# Altium PCB NEW_UI.PcbDoc (part 2 of 4)
Units mm, origin at the board's own origin, x right, y up, seen from the top; angles counter-clockwise.
Board outline 100 x 100 mm, 4 copper layers (SIG/PWR1, GND1, GNS2, SIG/PWR2), stack 1.17 mm thick; 240 components, 215 nets, 917 pads, 445 vias.
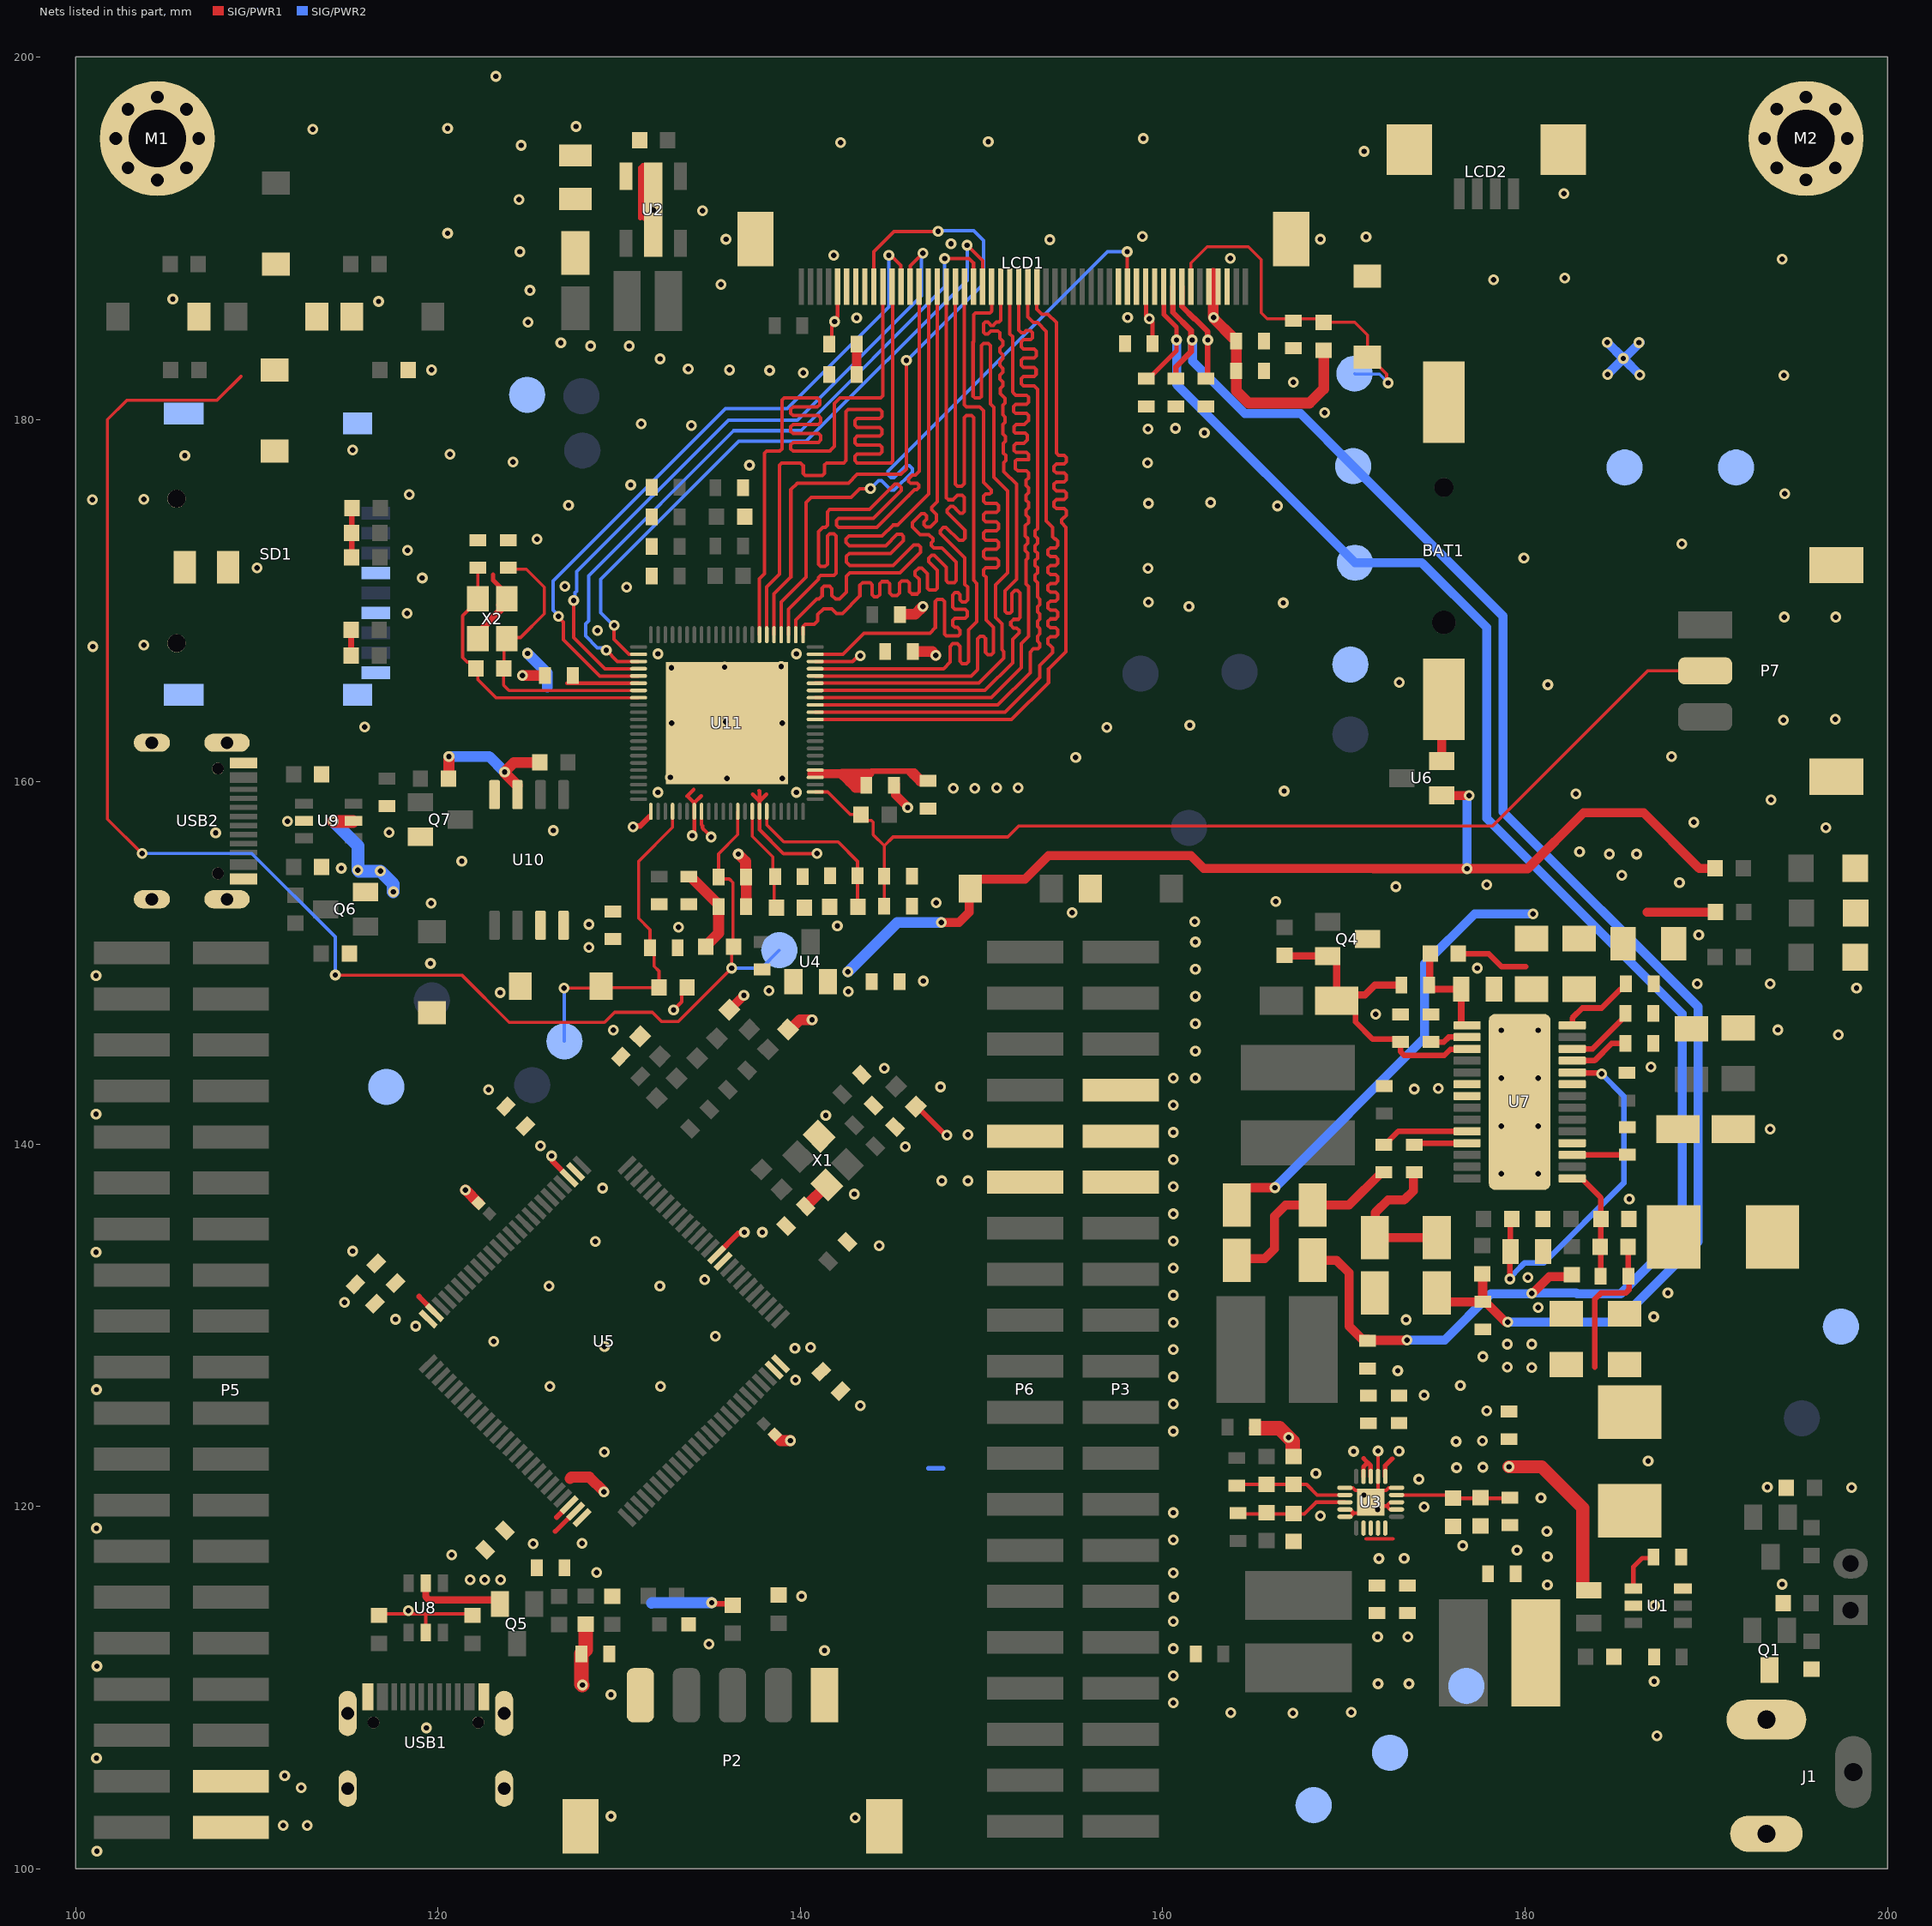
[diagram p4: the nets of this part, all layers, seen from the top]

## Via types
v1: diameter 0.6, hole 0.3, SIG/PWR1 to SIG/PWR2, tented both sides, 431 vias
v2: diameter 0.6, hole 0.3, SIG/PWR1 to SIG/PWR2, tented bottom, 12 vias
v3: diameter 0.6, hole 0.3, SIG/PWR1 to SIG/PWR2, 2 vias

## Nets (pads, with @x,y where several pads share a name; then routed paths per layer and width w, separated by ;. In a path a pad name is that pad's centre, name@x,y a point inside that pad or via, vN(x,y) a via of type N, cw(c..) or ccw(c..) an arc to the next point about the centre after c; other vN are vias at no path point) (continued)
3V3: C5.2 C7.2 C14.2 C15.2 C16.2 C17.2 C18.2 C19.2 C61.2 C72.2 C73.2 C74.2 C75.2 C76.2 C82.2 C85.2 C86.2 L3.1 P2.5 P3.16 P3.17 P6.16 R8.2 R14.1 R16.1 R20.2 R22.1 R39.1 R45.2 R46.2 R47.2 R48.2 R49.2 R54.2 R59.2 R65.2 R70.2 SD1.4 SW2.2 TP14.1 U4.2 U5.11 U5.28 U5.50 U5.75 U5.100 U6.1 U10.3 U10.7 U10.8 U11.4 U11.5 U11.20 U11.50 U11.67 U11.74 | length 110.9
  SIG/PWR1 w0.2: C82.2@127.121,165.436 U11.50@131.068,165.436 ; v1(132.996,147.401) 133,147.401 133.452,147.853 133.452,148.348 R59.2@133.744,148.641 ; U11.74@134.543,158.361 134.543,157.621 134.597,157.567 134.597,157.462 134.608,157.416 134.655,157.369 v1(135.077,156.947) ; U11.20@140.818,166.636 142.881,166.636 143.199,166.954 v1(143.307,166.954)
  SIG/PWR1 w0.3: 143.816,160.467 143.929,160.58 146.304,160.58
  SIG/PWR1 w0.308: R46.2@115.201,166.954 R45.2@115.201,168.377 ; R49.2@115.227,172.39 115.24,172.403 115.24,175.095 R47.2@115.252,175.108 ; v1(126.263,139.344) 126.319,139.289 126.319,139.044 U5.28@127.239,138.124 ; v1(130.759,157.505) 130.815,157.561 131.165,157.561 U11.67@131.689,158.085 ; v1(135.103,114.681) 135.158,114.625 136.187,114.625 R14.1@136.271,114.542 ; U5.11@135.371,133.881 136.563,135.072 136.85,135.072 v1(136.906,135.128) ; R20.2@146.369,142.073 146.433,142.073 148.018,140.487 v1(148.082,140.487)
  SIG/PWR1 w0.4: 146.025,160.528 146.355,160.198
  SIG/PWR1 w0.5: 140.64,160.436 141.767,160.436 ; 141.783,160.452 142.291,160.452 ; 142.306,160.467 142.814,160.467 ; 142.84,160.467 143.348,160.467 ; 143.373,160.467 143.816,160.467 ; v1(147.777,152.222) 148.752,152.222 149.321,152.791 149.321,154.046 SW2.2@149.377,154.102 149.377,154.229 149.762,154.614 152.394,154.614 153.698,155.918 161.549,155.918 162.256,155.211 171.631,155.211 171.642,155.199 v1(176.801,155.199) 180.142,155.199 183.236,158.293 186.538,158.293 189.611,155.219 R39.1@190.487,155.219 ; U6.1@175.403,159.248 175.41,159.24 176.903,159.24 v1(176.911,159.233)
  SIG/PWR1 w0.6: R70.2@120.574,160.172 120.599,160.197 v1(120.599,161.392) ; U10.3@124.374,159.788 123.672,160.49 v1(123.672,160.541) 124.192,161.061 R54.2@125.615,161.061 ; C73.2@133.968,154.732 133.994,154.732 133.994,154.707 C72.2@135.371,153.329 ; R65.2@134.772,150.901 134.772,150.926 135.484,151.638 C72.2@135.484,153.111 ; R22.1@139.308,146.319 139.434,146.319 139.978,146.863 v1(140.64,146.863) ; 142.392,160.35 142.723,160.02 ; 143.277,160.02 142.723,160.02 ; C75.2@143.637,159.791 143.637,159.72 143.607,159.69 143.053,159.69 142.723,160.02 ; 146.253,160.426 146.634,160.045 C74.2@147.041,160.045
  SIG/PWR2 w0.5: v1(176.801,155.199) 176.801,159.095 176.911,159.206 v1(176.911,159.233)
  SIG/PWR2 w0.6: v1(120.599,161.392) 122.813,161.392 123.663,160.541 v1(123.672,160.541) ; v1(124.943,167.081) 126.022,166.002 126.022,165.227 ; 131.775,114.656 131.801,114.681 v1(135.103,114.681) ; v1(142.621,149.504) 145.339,152.222 v1(147.777,152.222)
  other v1: 129.54,109.601 181.229,115.672 128.753,116.357 181.229,117.221 179.553,117.577 127.94,117.958 181.204,118.618 139.7,128.727 140.564,128.778 118.77,129.946 117.653,130.327 137.897,135.128 125.654,139.903 149.25,140.513 142.646,148.412 128.321,150.851 128.321,152.121 148.438,159.639 149.631,159.639 150.825,159.664 152.019,159.664
"3V3 LCD": C45.2 C48.2 C49.2 C54.2 C55.2 C56.2 C57.2 C58.2 L7.2 LCD1.6 LCD1.7 LCD1.8 LCD1.39 LCD1.46 LCD1.47 R37.2 R40.2 TP10.1 | length 27.9
  SIG/PWR1 w0.254: LCD1.39@159.053,187.325 159.076,187.302 159.076,185.729 v1(159.256,185.549) 159.436,185.369 C55.2@159.436,184.175
  SIG/PWR1 w0.308: 183.85,127.68 183.85,131.439 184.186,131.775 185.547,131.775 185.729,131.957 185.729,132.666 C45.2@185.695,132.699 ; R37.2@185.683,134.323 185.693,134.313 C45.2@185.695,132.699
  SIG/PWR1 w0.5: C57.2@143.104,182.474 C58.2@143.104,184.15
  SIG/PWR1 w0.6: 162.789,188.062 162.789,185.649 v1(162.814,185.623) 162.814,185.572 163.898,184.489 164.029,184.489 164.059,184.459 C56.2@164.059,184.328 C54.2@164.059,182.677 164.059,181.585 164.744,180.899 168.097,180.899 168.885,181.686 R40.2@168.885,183.807
  other v1: 180.365,127.66 179.019,127.686 179.019,128.956 180.365,128.956 143.104,185.598
5V: C2.2 C6.2 C10.2 C11.2 C13.2 L1.2 P5.19 Q5.2 Q6.2 R1.2 TP6.1 U3.7 U3.8 U3.9 U3.10 U3.16 U3.18 U3.19 U8.5 U9.5 | length 26.3
  SIG/PWR1 w0.2: 171.228,118.212 172.695,118.212
  SIG/PWR1 w0.254: U3.19@171.081,121.653 171.08,121.654 171.08,122.186 171.208,122.314 ; 171.083,122.645 171.474,122.254 171.474,121.66 U3.18@171.481,121.653 ; U3.16@172.281,121.653 172.281,122.245 172.672,122.636
  SIG/PWR1 w0.4: U8.5@119.319,115.76 119.319,115.021 119.509,114.832 123.189,114.832 Q5.2@123.408,114.613
  SIG/PWR1 w0.712: v1(114.224,157.81) U9.5@115.303,157.81 ; v1(179.114,122.186) 180.912,122.186 183.185,119.913 183.185,115.468 183.286,115.367 R1.2@183.515,115.367
  SIG/PWR2 w0.712: v1(114.224,157.81) 115.57,156.464 v1(115.57,155.118) 115.621,155.067 v1(116.815,155.067) 117.526,154.356 v1(117.526,153.924)
  other v1: 112.446,104.47 111.531,105.131 121.768,115.951 122.58,115.951 123.444,115.951 171.933,117.119 173.325,117.129 176.218,122.136 177.666,122.161 170.536,123.038 173.043,123.05 176.193,123.583 177.641,123.609
9V: J1.1 P5.20 Q1.3 R2.2
  other v1: 111.455,102.387 112.776,102.387
10.4V: C3.2 C32.2 C33.2 C34.2 C51.2 D1.1 D4.2 LCD1.43 Q4.3 R5.2 R28.1 R30.2 TP8.1 U2.5 | length 44.3
  SIG/PWR1 w0.308: LCD1.43@161.053,187.325 161.057,187.321 161.057,186.238 161.754,185.542 161.787,185.542 162.484,184.845 v1(162.484,184.379) 162.484,182.347 C51.2@162.382,182.245 ; R30.2@176.311,150.505 177.993,150.505 178.714,149.784 180.043,149.784
  SIG/PWR1 w0.5: D4.2@164.084,136.628 164.084,137.053 164.609,137.578 164.888,137.578 164.902,137.592 v1(166.192,137.592) ; 186.741,152.806 R28.1@190.512,152.806
  SIG/PWR2 w0.5: v1(166.192,137.592) 174.455,145.855 174.455,149.944 177.216,152.705 v1(180.442,152.705) ; v1(184.531,184.252) v1(185.42,183.363) ; v1(184.556,182.474) 184.556,182.486 185.42,183.35 v1(185.42,183.363) ; v1(186.334,182.448) v1(185.42,183.363) ; v1@186.36,184.252 185.617,183.509 185.594,183.509 185.447,183.363 v1(185.42,183.363)
  other v1: 185.344,154.838 184.658,156.007 186.157,156.007 186.284,184.239
16V: C40.2 C52.2 D6.1 LCD1.41 R33.2 TP9.1 | length 98.2
  SIG/PWR1 w0.254: C52.2@159.08,182.245 159.211,182.245 160.757,183.79 v1(160.757,184.379) 160.757,185.09 160.053,185.793 LCD1.41@160.053,187.325
  SIG/PWR1 w0.5: D6.1@168.271,133.587 169.587,133.587 170.282,132.893 170.282,129.946 171.014,129.214 171.351,129.214 171.4,129.165 173.463,129.165 v1(173.482,129.184) ; v1(180.375,131.76) 180.402,131.76 180.464,131.822 180.488,131.822 181.344,132.677 182.46,132.677 R33.2@182.571,132.788
  SIG/PWR2 w0.5: v1(160.757,184.379) 160.776,184.359 160.776,181.921 TP9.1@170.612,172.085 174.295,172.085 177.876,168.504 177.876,157.988 188.671,147.193 188.671,135.128 185.268,131.724 182.876,131.724 182.817,131.783 180.425,131.783 180.421,131.779 v1@180.392,131.779 ; v1(173.482,129.184) 175.565,129.184 178.123,131.743 180.358,131.743 v1(180.375,131.76)
-7V: C41.1 C53.2 D5.2 LCD1.42 R34.2 TP11.1 | length 87.5
  SIG/PWR1 w0.308: LCD1.42@160.553,187.325 160.557,187.321 160.557,185.908 161.564,184.902 161.564,184.434 v1(161.62,184.379) ; C53.2@160.731,182.245 160.731,182.905 161.564,183.739 161.564,184.358 v1@161.544,184.379
  SIG/PWR1 w0.5: D5.2@175.129,131.784 175.62,131.293 C41.1@177.658,131.293 ; R34.2@177.643,132.839 177.658,132.824 177.658,131.307 177.789,131.307 178.902,130.194 179.025,130.194 v1(179.045,130.175)
  SIG/PWR2 w0.5: v1(161.62,184.379) 161.639,184.359 161.639,183.216 164.541,180.315 167.615,180.315 TP11.1@170.51,177.419 178.791,169.139 178.791,158.344 189.56,147.574 189.56,134.62 185.115,130.175 v1(179.045,130.175)
B0: LCD1.12 U11.49 | length 38.2
  SIG/PWR1 w0.191: v1(126.642,169.131) 126.642,169.083 126.924,168.801 126.924,167.843 128.931,165.836 U11.49@131.068,165.836 ; v1(144.882,189.052) 144.99,189.052 145.548,188.494 145.548,187.33 LCD1.12@145.553,187.325
  SIG/PWR2 w0.191: v1(126.642,169.131) 126.642,169.158 126.34,169.461 126.34,171.069 135.865,180.594 139.268,180.594 144.882,186.207 v1(144.882,189.052)
B1: LCD1.13 U11.48 | length 37.9
  SIG/PWR1 w0.191: v1(127.483,170.002) 127.483,167.955 129.201,166.236 U11.48@131.068,166.236 ; LCD1.13@146.053,187.325 146.067,187.339 146.067,188.485 v1(146.761,189.179)
  SIG/PWR2 w0.191: v1(127.483,170.002) 127.559,170.079 127.559,170.43 127.648,170.519 127.648,171.59 136.017,179.959 139.827,179.959 146.679,186.811 146.679,189.097 v1(146.761,189.179)
B2: LCD1.14 U11.25 | length 40.2
  SIG/PWR1 w0.191: U11.25@139.343,168.111 139.343,169.518 140.995,171.171 140.995,171.266 141.118,171.389 141.854,171.389 141.977,171.511 141.977,173.555 141.854,173.677 141.609,173.677 141.486,173.555 141.486,172.002 141.364,171.88 141.118,171.88 140.995,172.002 140.995,173.812 141.224,174.041 141.275,174.041 141.37,174.041 141.493,174.164 141.493,174.9 141.616,175.022 143.815,175.022 145.211,176.419 145.385,176.419 145.558,176.246 145.558,176.072 144.018,174.532 142.106,174.532 141.984,174.409 141.984,174.164 142.106,174.041 144.221,174.041 145.956,175.775 146.11,175.929 146.294,176.114 146.425,176.114 146.543,176.231 146.543,176.379 146.442,176.479 146.076,176.479 145.975,176.58 145.975,176.721 146.19,176.936 146.355,176.936 146.553,177.135 LCD1.14@146.553,187.325 LCD1.14@146.553,187.835
B3: LCD1.15 U11.24 | length 41.2
  SIG/PWR1 w0.191: U11.24@139.743,168.111 139.743,168.927 140.894,170.078 141.021,170.078 141.199,170.256 141.199,170.688 141.3,170.79 141.605,170.79 141.732,170.663 141.732,170.282 141.935,170.078 142.164,170.078 142.545,170.459 142.545,171.348 142.723,171.526 145.491,171.526 146.634,172.669 146.634,172.949 146.507,173.076 146.253,173.076 145.11,171.933 142.723,171.933 142.545,172.11 142.545,172.441 142.697,172.593 144.983,172.593 145.694,173.304 145.694,173.548 145.583,173.66 145.339,173.66 144.704,173.025 142.697,173.025 142.519,173.203 142.519,173.406 142.672,173.558 144.501,173.558 145.11,174.168 145.364,174.168 147.073,175.876 LCD1.15@147.073,187.854
B4: LCD1.16 U11.23 | length 40.3
  SIG/PWR1 w0.191: U11.23@140.143,168.111 140.148,168.117 140.148,168.571 140.259,168.681 140.767,168.681 140.957,168.872 140.957,169.228 141.275,169.545 141.733,169.545 141.987,169.291 142.316,169.291 143.281,170.256 143.281,170.84 143.434,170.993 143.85,170.993 143.967,170.876 143.967,170.326 144.084,170.209 144.25,170.209 144.374,170.332 144.374,170.926 144.491,171.044 144.815,171.044 144.932,170.926 144.932,170.409 145.059,170.282 145.339,170.282 145.466,170.409 145.466,170.952 145.583,171.069 145.907,171.069 146.025,170.952 146.025,170.485 146.152,170.358 146.431,170.358 146.558,170.485 146.558,171.171 146.329,171.399 146.329,171.602 146.526,171.799 146.692,171.799 147.015,171.475 147.015,170.677 147.116,170.577 147.455,170.577 147.555,170.677 147.555,171.672 147.091,172.136 147.091,172.339 147.244,172.491 147.396,172.491 148.057,171.831 148.057,171.093 148.157,170.993 148.49,170.993 148.59,171.093 148.59,172.11 147.803,172.898 147.374,172.898 147.227,173.044 147.227,173.186 147.313,173.271 147.313,173.413 147.091,173.634 146.609,173.634 146.177,174.066 146.177,174.295 146.678,174.796 146.844,174.796 146.964,174.676 146.964,174.498 146.815,174.349 146.815,174.183 146.933,174.066 147.168,174.066 147.498,174.396 147.498,174.752 147.239,175.011 147.239,175.153 147.553,175.468 LCD1.16@147.553,187.325
B5: LCD1.17 U11.21 | length 40.1
  SIG/PWR1 w0.191: U11.21@140.818,167.036 142.348,167.036 143.51,168.199 147.142,168.199 147.447,168.504 147.447,169.936 147.564,170.053 147.828,170.053 147.945,169.936 147.945,168.147 148.046,168.046 148.718,168.046 148.819,168.147 148.819,168.351 148.656,168.513 148.514,168.513 148.397,168.631 148.397,168.894 148.514,169.012 149.098,169.012 149.215,169.129 149.215,169.393 149.098,169.51 148.514,169.51 148.397,169.627 148.397,170.291 148.536,170.431 148.701,170.431 148.819,170.313 148.819,170.043 148.936,169.926 149.108,169.926 149.225,170.043 149.225,170.746 149.073,170.898 149.073,172.348 147.71,173.711 147.71,173.853 147.893,174.036 148.035,174.036 148.75,173.321 148.963,173.321 149.08,173.438 149.08,173.874 148.09,174.865 148.09,175.007 148.29,175.208 148.432,175.208 148.565,175.076 148.565,175.057 148.805,174.816 148.805,174.814 148.947,174.814 149.047,174.914 149.047,175.686 148.93,175.803 148.666,175.803 148.428,175.565 148.171,175.565 148.053,175.682 LCD1.17@148.053,187.325
B6: LCD1.18 U11.19 | length 40
  SIG/PWR1 w0.191: U11.19@140.818,166.236 147.898,166.236 148.26,166.599 148.26,167.462 148.412,167.615 148.666,167.615 148.81,167.47 148.81,166.644 148.937,166.517 149.162,166.517 149.28,166.634 149.28,168.38 149.733,168.834 149.733,170.942 149.555,171.12 149.555,180.096 149.438,180.213 149.164,180.213 149.047,180.096 149.047,176.454 148.895,176.301 148.671,176.301 148.553,176.419 LCD1.18@148.553,187.325
B7: LCD1.19 U11.18 | length 39.8
  SIG/PWR1 w0.191: U11.18@140.818,165.836 149.428,165.836 149.784,166.192 149.784,167.894 149.912,168.022 150.098,168.022 150.216,167.905 150.216,167.143 150.344,167.015 150.53,167.015 150.647,167.132 150.647,168.529 150.241,168.935 150.241,171.298 150.12,171.419 150.12,171.693 150.237,171.81 150.821,171.81 150.938,171.927 150.938,172.201 150.821,172.318 150.237,172.318 150.12,172.435 150.12,172.709 150.237,172.826 150.821,172.826 150.938,172.943 150.938,173.217 150.821,173.334 150.237,173.334 150.12,173.451 150.12,173.725 150.237,173.842 150.821,173.842 150.938,173.959 150.938,174.233 150.821,174.35 150.237,174.35 150.12,174.467 150.12,174.741 150.237,174.858 150.821,174.858 150.938,174.975 150.938,175.249 150.821,175.366 150.237,175.366 150.12,175.483 150.12,175.757 150.237,175.874 150.444,175.874 150.536,175.966 150.536,176.108 150.114,176.53 150.114,180.467 149.885,180.696 149.154,180.696 149.053,180.796 LCD1.19@149.053,187.325
F1C_OSC_IN: C71.2 R58.2 U11.51 X2.1 | length 16.6
  SIG/PWR1 w0.171: X2.1@123.793,167.897 123.635,167.739 R58.2@123.635,166.243 123.619,166.227 123.619,165.332 123.914,165.036 U11.51@131.068,165.036 ; X2.1@123.876,167.897 123.937,167.958 124.55,167.958 125.857,169.266 125.857,170.739 124.866,171.73 C71.2@123.876,171.73
F1C_OSC_OUT: C77.2 R58.1 U11.52 X2.3 | length 16.2
  SIG/PWR1 w0.171: C77.2@122.199,171.73 122.199,170.103 X2.3@122.193,170.097 122.193,169.997 121.355,169.159 121.355,166.856 121.604,166.607 121.745,166.607 122.085,166.268 R58.1@122.085,166.243 122.196,166.131 122.196,165.636 123.196,164.636 U11.52@131.068,164.636
F1C_RST: C78.2 R59.1 SW5.2 TP24.1 U11.70 | length 19.2
  SIG/PWR1 w0.171: v1(126.949,148.615) 128.905,148.615 SW5.2@129.007,148.717 129.083,148.641 R59.1@132.194,148.641 132.194,149.543 131.927,149.81 131.927,150.704 C78.2@131.795,150.836 ; C78.2@131.699,150.825 131.699,151.824 131.064,152.459 131.064,155.6 132.943,157.479 U11.70@132.943,158.361
  SIG/PWR2 w0.171: v1(126.949,148.615) 126.962,148.603 126.962,145.682 TP24.1@126.975,145.669
G0: LCD1.20 U11.47 | length 37.7
  SIG/PWR1 w0.191: v1(129.286,167.259) 129.909,166.636 U11.47@131.068,166.636 ; v1(147.96,188.879) 149.305,188.879 149.553,188.63 LCD1.20@149.553,187.325
  SIG/PWR2 w0.191: v1(129.286,167.259) 129.178,167.259 129.04,167.397 128.797,167.397 128.143,168.05 128.143,168.707 128.321,168.884 128.321,171.374 136.322,179.375 140.03,179.375 147.96,187.305 v1(147.96,188.879)
G1: LCD1.21 U11.46 | length 37
  SIG/PWR1 w0.191: v1(129.718,168.631) 129.701,168.613 129.701,167.869 130.532,167.038 131.066,167.038 U11.46@131.068,167.036 ; v1(149.2,189.611) 150.053,188.757 LCD1.21@150.053,187.325
  SIG/PWR2 w0.191: v1(129.718,168.631) 129.671,168.631 128.981,169.32 128.981,171.171 136.601,178.791 140.31,178.791 149.2,187.681 v1(149.2,189.611)
G2: LCD1.22 U11.17 | length 40
  SIG/PWR1 w0.191: U11.17@140.818,165.436 149.841,165.436 151.232,166.827 151.232,167.183 151.13,167.284 151.13,168.721 150.774,169.077 150.774,170.866 151.435,171.526 151.435,176.047 150.673,176.809 150.673,180.67 150.495,180.848 150.495,184.082 150.378,184.199 150.104,184.199 149.987,184.082 149.987,181.264 149.901,181.178 149.63,181.178 149.53,181.279 149.53,184.252 149.555,184.277 149.555,185.777 149.656,185.877 150.453,185.877 150.553,185.978 LCD1.22@150.553,187.325
G3: LCD1.23 U11.16 | length 39.7
  SIG/PWR1 w0.191: U11.16@140.818,165.036 150.19,165.036 151.714,166.56 151.714,167.863 152.065,168.214 152.065,168.356 151.937,168.484 151.765,168.484 151.613,168.636 151.613,168.808 151.765,168.961 152.02,168.961 152.121,169.061 152.121,170.409 151.976,170.554 151.834,170.554 151.673,170.393 151.673,169.402 151.566,169.295 151.4,169.295 151.282,169.412 151.282,170.529 151.927,171.174 151.927,176.419 151.224,177.121 151.224,177.615 151.342,177.733 151.342,178.006 151.205,178.143 151.205,178.671 151.322,178.788 151.322,179.062 151.185,179.199 151.185,179.726 151.302,179.843 151.302,180.117 151.165,180.254 151.165,180.782 151.282,180.899 151.282,181.173 151.028,181.427 151.028,181.7 151.181,181.853 151.181,182.056 151.009,182.228 151.009,182.431 151.181,182.603 151.181,182.806 151.009,182.979 151.009,183.182 151.181,183.354 151.181,183.557 151.009,183.729 151.009,183.932 151.181,184.104 151.181,184.308 151.003,184.485 151.003,184.785 150.901,184.887 150.649,184.887 150.647,184.885 150.519,184.885 150.443,184.809 150.343,184.709 150.214,184.709 150.114,184.809 150.114,185.269 150.214,185.369 150.343,185.369 150.418,185.293 150.519,185.193 150.647,185.193 150.723,185.269 150.823,185.369 150.952,185.369 151.053,185.471 LCD1.23@151.053,187.325
G4: LCD1.24 U11.15 | length 39.6
  SIG/PWR1 w0.191: U11.15@140.818,164.636 150.539,164.636 152.197,166.294 152.197,167.615 152.603,168.021 152.603,170.764 152.451,170.917 152.451,172.237 152.552,172.339 152.552,172.613 152.416,172.75 152.416,173.023 152.552,173.16 152.552,173.434 152.416,173.571 152.416,174.133 152.588,174.305 152.588,174.579 152.451,174.716 152.451,174.989 152.588,175.126 152.588,175.4 152.451,175.537 152.451,175.81 152.588,175.947 152.588,176.221 152.451,176.358 152.451,176.632 152.586,176.766 152.586,177.04 152.468,177.157 151.997,177.157 151.867,177.288 151.867,177.698 151.951,177.782 152.586,177.782 152.586,178.056 152.468,178.173 151.9,178.173 151.79,178.283 151.79,178.556 151.908,178.673 152.344,178.673 152.527,178.857 152.527,179.131 152.41,179.248 151.867,179.248 151.79,179.324 151.79,179.598 151.908,179.715 152.369,179.715 152.527,179.873 ; LCD1.24@151.553,187.325 151.553,184.717 151.709,184.562 151.709,181.514 ; 151.767,181.456 151.884,181.338 152.468,181.338 152.586,181.221 152.586,180.948 152.468,180.83 151.884,180.83 151.767,180.713 151.767,180.44 151.884,180.322 152.468,180.322 152.586,180.205 152.586,179.932
G5: LCD1.25 U11.14 | length 39.7
  SIG/PWR1 w0.191: U11.14@140.818,164.236 150.901,164.236 152.679,166.014 152.679,167.157 152.864,167.342 153.112,167.342 153.213,167.443 153.213,167.629 153.086,167.756 153.086,168.035 153.213,168.162 153.213,168.442 153.086,168.569 153.086,168.848 153.213,168.975 153.213,169.254 153.086,169.381 153.086,169.661 153.213,169.788 153.213,170.067 153.086,170.194 153.086,170.993 152.959,171.12 152.959,171.399 153.086,171.526 153.086,171.806 152.959,171.933 152.959,172.212 153.086,172.339 153.086,172.618 152.959,172.745 152.959,173.025 153.086,173.152 153.086,173.431 152.959,173.558 152.959,173.838 153.086,173.965 153.086,181.661 152.892,181.854 152.308,181.854 152.191,181.971 152.191,182.245 152.308,182.362 152.892,182.362 153.01,182.479 153.01,182.753 152.892,182.87 152.308,182.87 152.191,182.987 152.197,182.993 152.197,183.267 152.314,183.384 152.898,183.384 153.015,183.501 153.015,183.775 152.898,183.892 152.314,183.892 152.197,184.009 152.197,184.283 152.314,184.4 152.701,184.4 152.806,184.506 152.806,184.779 152.689,184.896 152.461,184.896 152.349,184.785 152.197,184.785 152.053,184.928 LCD1.25@152.053,187.325
G6: LCD1.26 U11.13 | length 40.3
  SIG/PWR1 w0.191: U11.13@140.818,163.836 151.289,163.836 153.213,165.76 153.213,166.421 153.924,167.132 153.924,167.294 153.924,167.389 153.801,167.512 153.791,167.512 153.668,167.635 153.668,167.88 153.791,168.003 154.082,168.003 154.204,168.126 154.204,168.371 154.082,168.494 153.791,168.494 153.668,168.617 153.668,168.862 153.791,168.985 154.082,168.985 154.204,169.107 154.204,169.353 154.082,169.475 153.791,169.475 153.668,169.598 153.668,169.844 153.791,169.966 154.082,169.966 154.204,170.089 154.204,170.334 154.082,170.457 153.791,170.457 153.668,170.58 153.668,170.825 153.791,170.948 154.082,170.948 154.204,171.071 154.204,171.316 154.082,171.439 153.791,171.439 153.668,171.561 153.668,171.807 153.791,171.929 154.082,171.929 154.204,172.052 154.204,172.298 154.082,172.42 153.791,172.42 153.668,172.543 153.668,172.788 153.791,172.911 154.082,172.911 154.204,173.034 154.204,173.279 154.082,173.402 154.047,173.402 153.924,173.525 153.924,173.812 153.924,174.041 153.568,174.396 153.568,184.861 153.086,185.344 152.857,185.344 152.553,185.648 LCD1.26@152.553,187.325
G7: LCD1.27 U11.12 | length 40.5
  SIG/PWR1 w0.191: U11.12@140.818,163.436 151.651,163.436 153.695,165.481 153.695,166.218 154.661,167.183 154.661,174 154.661,174.045 154.416,174.29 154.416,174.463 154.538,174.586 154.56,174.586 154.683,174.709 154.683,174.954 154.56,175.077 154.123,175.077 154,175.199 154,175.445 154.123,175.568 154.56,175.568 154.683,175.69 154.683,175.936 154.56,176.058 154.123,176.058 154,176.181 154,176.426 154.123,176.549 154.56,176.549 154.683,176.672 154.683,176.917 154.56,177.04 154.123,177.04 154,177.163 154,177.408 154.123,177.531 154.56,177.531 154.683,177.653 154.683,177.899 154.56,178.022 154.25,178.022 154.127,178.144 154.127,178.414 154.127,185.344 153.67,185.801 153.34,185.801 153.053,186.087 LCD1.27@153.053,187.325
GND: BAT1.N C2.1 C3.1 C4.2 C6.1 C7.1 C9.1 C10.1 C11.1 C13.1 C14.1 C15.1 C16.1 C17.1 C18.1 C19.1 C20.2 C21.2 C22.1 C23.1 C24.1 C27.1 C28.1 C29.1 C30.1 C32.1 C33.1 C34.1 C35.1 C36.1 C37.1 C40.1 C41.2 C43.1 C44.1 C46.1 C47.1 C48.1 C49.1 C50.2 C51.1 C52.1 C53.1 C54.1 C55.1 C56.1 C57.1 C58.1 C60.1 C61.1 C62.1 C63.1 C64.1 C65.1 C66.1 C67.1 C68.1 C69.1 C70.1 C71.1 C72.1 C73.1 C74.1 C75.1 C76.1 C77.1 C78.1 C80.1 C81.1 C82.1 C83.1 C84.1 C85.1 C86.1 C87.1 C88.1 D2.1 D7.1 D8.2 D9.1 D10.1 D11.1 J1.2 LCD1.5 LCD1.36 LCD1.38 LCD1.40 LCD1.48 LCD1.51 LCD1.52 LCD2.S1 LCD2.S2 M1.G M2.G P2.1 P2.6 P3.15 P6.15 P7.4 Q7.2 R4.1 R6.1 R7.1 R9.1 R11.1 R13.1 R15.1 R18.1 R21.2 R25.1 R27.1 R32.1 R35.1 R38.1 R42.2 R43.2 R44.2 R51.2 R52.2 R53.2 R56.1 R57.1 R63.1 R69.2 SD1.6 SD1.9 SW1.1 SW3.1 SW4.1 SW5.1 SW10.1 TP12.1 TP13.1 TP15.1 TP16.1 TP18.1 U1.2 U2.2 U3.1 U3.4 U3.5 U3.12 U3.13 U3.15 U3.17 U3.21 U4.1 U5.10 U5.27 U5.74 U5.99 U7.6 U7.7 U7.23 U7.29 U8.2 U9.2 U10.4 U11.73 U11.82 U11.89 USB1.A1 USB1.B1 USB1.SHIELD USB2.A1 USB2.B1 USB2.SHIELD X1.2 X1.4 X2.2 X2.4 | length 64.6
  SIG/PWR1 w0.2: R44.2@116.738,113.983 116.827,114.071 119.329,114.071 ; U8.2@119.319,113.03 119.324,113.035 119.324,114.066 119.329,114.071 ; R43.2@121.895,113.983 121.806,114.071 119.329,114.071 ; 133.743,159.193 133.763,159.214 ; v1(134.036,157.023) 134.036,157.131 134.143,157.238 U11.73@134.143,158.361 U11.73@134.143,158.834 ; 134.112,159.563 133.763,159.214 ; 134.522,159.214 U11.73@134.143,158.834 ; 137.363,159.304 137.743,158.925 ; 137.719,159.512 137.743,159.488 137.743,158.925 ; 138.122,159.304 137.743,158.925 ; v1(140.919,156.032) 139.065,156.032 137.743,157.355 U11.82@137.743,158.361 137.743,158.925 ; C58.1@141.58,184.15 141.81,184.38 141.736,184.454 141.736,184.794 ; 141.735,184.795 141.735,185.137 141.884,185.286 v1(141.884,185.395) 141.884,185.503 142.053,185.672 LCD1.5@142.053,187.325 ; U3.5@170.056,119.428 170.35,119.428 170.548,119.626 170.548,119.63 ; U3.4@170.056,119.828 170.35,119.828 170.548,119.63 ; U3.1@170.056,121.028 170.064,121.02 170.483,121.02 170.527,120.976 170.539,120.976 170.637,120.878 170.831,120.878 U3.21@171.481,120.228 ; U3.21@171.019,119.918 171.019,119.818 170.831,119.63 170.548,119.63 ; U3.21@171.087,119.85 U3.21@171.397,120.16 ; U3.21@171.329,120.228 U3.21@171.481,120.228 ; U3.17@171.881,121.653 U3.21@171.881,120.628 ; U3.17@171.881,121.653 v1(171.882,123.063) ; 172.363,120.026 U3.13@172.561,120.224 ; U3.12@172.561,119.824 172.363,120.022 172.028,120.022 171.822,120.228 U3.21@171.481,120.228 ; U3.15@172.906,121.028 172.898,121.02 172.479,121.02 172.435,120.976 172.423,120.976 172.325,120.878 172.131,120.878 U3.21@171.881,120.628 ; 133.763,159.214 U11.73@134.143,158.834 ; U3.21@171.481,120.228 U3.21@171.881,120.628
  SIG/PWR1 w0.254: 123.038,171.425 123.038,171.121 X2.2@123.793,170.365 ; 126.441,118.618 126.472,118.618 U5.74@127.593,119.739 ; 131.166,191.116 131.166,193.882 131.314,194.031 131.318,194.031 ; 131.369,191.084 131.369,193.85
  SIG/PWR1 w0.4: X2.4@122.543,168.578 X2.2@123.443,169.478
  SIG/PWR1 w0.5: X2.4@122.193,167.897 X2.4@122.543,168.247 ; X2.2@123.443,169.747 X2.2@123.793,170.097 X2.2@123.793,170.365 ; R25.1@136.079,147.411 136.081,147.411 136.879,148.209 v1(136.881,148.209) ; C75.1@145.161,159.944 145.241,159.864 145.241,159.288 145.904,158.625 v1@145.904,158.591
  SIG/PWR1 w0.6: v1(121.514,137.465) R21.2@122.233,136.745 ; v1(124.663,165.862) C82.1@125.908,165.862 ; 127.28,121.54 127.359,121.619 128.343,121.619 v1(129.159,120.802) ; v1(136.576,156.007) 136.978,155.605 136.978,154.767 C81.1@137.008,154.737 C72.1@137.008,153.111 ; R18.1@138.578,123.956 138.908,123.627 v1(139.451,123.627) ; C14.1@140.29,136.556 140.29,136.563 141.464,137.738 X1.2@141.464,137.746 ; C69.1@145.491,169.215 145.517,169.24 146.329,169.24 v1(146.761,169.672) ; C76.1@146.202,167.183 147.269,167.183 v1(147.472,166.98)
  SIG/PWR1 w0.8: v1(127.965,110.134) 127.914,110.185 C19.1@127.914,111.862 127.923,111.862 128.143,112.081 R42.2@128.143,113.5 ; C88.1@165.17,124.323 166.431,124.323 v1(166.954,123.8) 167.177,123.577 167.177,122.783 167.202,122.758 R13.1@167.227,122.758
  SIG/PWR2 w0.254: 147.065,122.097 147.867,122.097
  other v1: 101.168,100.965 143.027,102.819 129.54,102.895 101.143,106.096 187.274,107.34 119.355,107.772 167.183,108.585 163.754,108.61 170.409,108.636 160.58,109.151 171.882,110.211 173.584,110.211 187.122,110.338 160.58,110.651 101.168,111.176 141.326,112.039 160.58,112.151 134.95,112.395 171.856,112.801 173.533,112.801 160.58,113.651 118.364,114.249 187.147,114.529 160.604,114.986 140.056,115.037 194.183,115.697 160.579,116.332 120.752,117.323 176.555,117.831 125.247,117.932 160.581,118.151 101.143,118.796 168.7,119.469 160.581,119.651 174.422,119.964 180.873,120.472 198.018,121.031 193.37,121.056 174.135,121.501 168.453,121.818 186.792,122.504 129.184,122.993 160.582,124.151 177.876,125.273 143.307,125.552 160.582,125.651 174.422,126.136 101.143,126.441 126.168,126.619 132.283,126.619 176.428,126.67 139.725,126.975 160.582,127.151 172.974,127.483 177.673,128.27 160.582,128.651 129.184,128.829 123.069,129.108 135.306,129.388 160.583,130.151 173.431,130.302 187.101,130.47 180.721,130.979 114.833,131.267 160.583,131.651 187.884,131.775 126.127,132.165 132.241,132.165 134.722,132.512 180.155,132.626 160.583,133.151 101.117,134.036 115.291,134.087 144.348,134.391 128.676,134.62 160.583,134.651 160.582,136.144 185.75,136.957 142.977,137.236 129.083,137.566 160.583,137.644 147.803,137.973 149.25,137.973 178.685,138.353 180.717,138.353 160.583,139.144 145.796,139.852 160.583,140.644 193.523,140.818 178.685,140.995 180.717,140.995 141.402,141.58 101.117,141.656 160.583,142.144 122.784,143.002 173.881,143.037 175.205,143.063 147.726,143.154 160.584,143.637 161.799,143.631 178.685,143.636 180.717,143.636 144.632,144.175 186.94,144.256 161.8,145.124 197.282,146.025 178.685,146.278 180.717,146.278 129.675,146.296 193.954,146.304 161.799,146.651 171.75,147.16 161.799,148.151 123.419,148.361 138.26,148.471 198.298,148.615 189.509,148.844 193.523,148.844 146.787,148.996 101.117,149.301 161.799,149.651 177.368,149.708 119.583,149.966 161.799,151.151 189.586,151.536 133.274,151.968 142.037,152.044 161.773,152.273 154.991,152.781 119.609,153.289 147.498,153.314 166.243,153.391 172.872,154.203 177.876,154.305 188.519,154.432 114.66,155.219 121.31,155.619 183.007,156.134 107.721,157.175 117.302,157.206 126.365,157.302 196.596,157.455 189.306,157.759 111.684,157.81 145.923,158.572 193.573,159.004 182.804,159.334 132.131,159.41 139.776,159.41 166.7,159.487 155.194,161.341 188.087,161.392 156.921,162.992 115.951,163.017 161.493,163.119 194.259,163.398 197.129,163.449 181.254,165.354 173.05,165.481 132.131,167.056 139.776,167.056 100.94,167.462 103.759,167.538 128.797,168.351 194.31,169.088 197.155,169.088 118.288,169.291 161.442,169.672 166.649,169.875 159.207,169.901 130.404,170.739 126.994,170.79 119.126,171.247 159.182,171.78 110.007,171.806 179.934,172.339 118.313,172.771 188.646,173.126 125.46,173.38 166.335,175.225 127.203,175.26 159.207,175.362 162.636,175.412 100.914,175.565 103.759,175.59 118.415,175.844 194.335,175.895 130.632,176.378 137.185,177.47 159.156,177.597 124.134,177.648 106.02,178.003 120.65,178.079 115.291,178.308 162.296,179.263 159.182,179.476 160.706,179.502 133.985,179.654 131.216,179.756 168.935,180.365 167.208,182.042 194.285,182.423 140.157,182.575 138.303,182.702 119.634,182.728 136.093,182.728 133.807,182.778 132.258,183.337 128.422,184.048 130.556,184.048 126.771,184.226 124.968,185.369 158.064,185.623 116.713,186.512 105.359,186.639 125.07,187.122 135.611,187.452 178.257,187.706 182.194,187.808 194.183,188.849 163.728,188.895 141.834,189.052 124.511,189.255 148.311,189.687 153.772,189.916 135.89,189.941 168.707,189.941 171.221,190.068 158.877,190.094 120.523,190.271 134.595,191.516 124.46,192.126 182.143,192.456 171.12,194.793 124.587,195.123 142.215,195.275 150.368,195.326 158.928,195.504 113.081,196.012 120.523,196.063 127.61,196.164 123.19,198.933
  other v2: 171.859,119.834 171.103,120.622 135.944,160.179 139.002,160.181 132.821,160.243 132.885,163.235 139,163.238 135.878,163.301 132.883,166.292 135.814,166.319 138.936,166.358 131.877,191.567
LCD_RST: C60.2 LCD1.44 R40.1 SW3.2 TP3.1 | length 20.5
  SIG/PWR1 w0.171: LCD1.44@161.553,187.325 161.553,188.63 162.458,189.535 164.719,189.535 165.43,188.824 165.43,185.877 165.76,185.547 168.694,185.547 R40.1@168.885,185.357 170.599,185.357 171.298,184.658 SW3.2@171.298,183.439 171.425,183.439 172.359,182.505 172.359,182.098 v1(172.441,182.016)
  SIG/PWR2 w0.171: TP3.1@170.586,182.524 170.613,182.498 171.959,182.498 v1(172.441,182.016) v1@172.517,182.093
LEN: LCD1.9 U11.27 | length 38.3
  SIG/PWR1 w0.191: U11.27@138.543,168.111 138.543,170.369 139.471,171.298 139.471,176.124 139.827,176.479 142.646,176.479 143.129,176.962 145.542,176.962 145.847,177.267 v1(145.847,183.261) ; LCD1.9@144.053,187.325 144.053,189.265 145.161,190.373 v1(147.599,190.373)
  SIG/PWR2 w0.191: v1(145.847,183.261) 145.891,183.261 150.114,187.484 150.114,189.865 149.569,190.41 147.636,190.41 v1(147.599,190.373)
LHSYNC: LCD1.11 U11.28 | length 40.7
  SIG/PWR1 w0.191: U11.28@138.143,168.111 138.143,170.756 138.836,171.45 138.836,177.48 138.954,177.597 140.005,177.597 140.157,177.444 140.157,177.023 140.269,176.911 141.214,176.911 141.326,177.023 141.326,177.485 141.437,177.597 142.386,177.597 142.509,177.72 142.509,180.419 142.632,180.542 144.384,180.542 144.507,180.419 144.507,180.174 144.384,180.051 143.122,180.051 143,179.928 143,179.683 143.122,179.56 144.384,179.56 144.507,179.437 144.507,179.192 144.384,179.069 143.122,179.069 143,178.947 143,178.701 143.122,178.578 144.384,178.578 144.507,178.456 144.507,178.21 144.384,178.088 143.122,178.088 143,177.965 143,177.72 143.122,177.597 144.602,177.597 144.992,177.597 145.103,177.709 145.103,187.275 LCD1.11@145.053,187.325
LSCK: LCD1.37 U11.26 | length 37.2
  SIG/PWR1 w0.191: U11.26@138.943,168.111 138.943,169.931 140.31,171.298 140.31,175.412 140.589,175.692 142.799,175.692 143.266,176.159 143.85,176.159 v1(143.866,176.174) ; v1(158.039,189.255) 158.046,189.248 158.046,187.332 LCD1.37@158.053,187.325
  SIG/PWR2 w0.191: v1(143.866,176.174) 144.234,176.543 144.301,176.61 144.475,176.61 144.995,176.09 145.169,176.09 146.178,177.099 146.178,177.272 146.005,177.446 145.831,177.446 145.169,176.784 144.995,176.784 144.822,176.957 144.822,177.131 145.616,177.925 145.771,178.079 156.947,189.255 v1(158.039,189.255)
LVSYNC: LCD1.10 U11.29 | length 40
  SIG/PWR1 w0.191: U11.29@137.743,168.111 137.743,171.194 138.024,171.475 138.024,178.141 138.124,178.242 138.76,178.242 138.856,178.242 138.978,178.364 138.978,181.064 139.101,181.187 140.937,181.187 141.059,181.064 141.059,180.818 140.937,180.696 139.592,180.696 139.469,180.573 139.469,180.328 139.592,180.205 140.99,180.205 141.113,180.082 141.113,179.837 140.99,179.714 139.592,179.714 139.469,179.591 139.469,179.346 139.592,179.223 140.99,179.223 141.113,179.101 141.113,178.855 140.99,178.732 139.592,178.732 139.469,178.61 139.469,178.364 139.592,178.242 141.208,178.242 141.625,178.242 141.884,178.501 141.884,180.873 142.189,181.178 144.436,181.178 144.553,181.295 LCD1.10@144.553,187.325
NetBAT1_P: BAT1.P U6.2 | length 3.4
  SIG/PWR1 w0.5: U6.2@175.403,161.148 175.403,164.43 BAT1.P@175.514,164.542
NetC1_1: C1.1 L1.1 U1.6
NetC1_2: C1.2 U1.1 | length 2.5
  SIG/PWR1 w0.254: U1.1@185.978,115.466 185.978,116.662 186.461,117.145 187.026,117.145 C1.2@187.089,117.208
NetC5_1: C5.1 R8.1 R9.2 U3.14 | length 6.3
  SIG/PWR1 w0.2: U3.14@172.906,120.628 175.834,120.628 R9.2@176.015,120.447 179.127,120.447 C5.1@179.165,120.485
NetC8_1: C8.1 R10.1 R11.2 U3.3 | length 6.2
  SIG/PWR1 w0.2: C8.1@164.153,119.621 164.191,119.583 167.227,119.583 167.818,119.583 168.463,120.228 U3.3@170.056,120.228
NetC12_1: C12.1 R12.1 R13.2 U3.2 | length 6.2
  SIG/PWR1 w0.2: C12.1@164.077,121.145 164.14,121.208 R12.1@165.728,121.208 R13.2@167.227,121.208 167.945,121.208 168.526,120.628 U3.2@170.056,120.628
NetC20_1: C20.1 U5.73 | length 1
  SIG/PWR1 w0.308: 126.553,119.405 U5.73@127.239,120.093
NetC21_1: C21.1 U5.49 | length 1.3
  SIG/PWR1 w0.308: 118.948,131.597 118.948,131.566 U5.49@119.815,130.699
NetC31_1: C31.1 R30.1 R32.2 U7.1 | length 5.9
  SIG/PWR1 w0.4: R30.1@174.773,150.492 R30.1@174.761,150.505 174.761,150.473 174.729,150.441 174.729,148.809 C31.1@174.697,148.778 174.697,148.725 174.873,148.549 R32.2@176.475,148.549 176.475,146.676 176.6,146.551 U7.1@176.801,146.551
NetC31_2: C31.2 C37.2 D3.1 Q4.2 R31.2 U7.3 | length 18.4
  SIG/PWR1 w0.308: D3.1@169.592,147.914 170.017,147.914 170.638,147.293 170.638,146.735 171.577,145.796 172.954,145.796 C37.2@173.122,145.628 173.122,145.095 173.325,144.891 175.535,144.891 175.868,145.224 176.774,145.224 U7.3@176.801,145.251
  SIG/PWR1 w0.4: R31.2@166.721,150.416 166.745,150.392 169.077,150.392 Q4.2@169.101,150.368 169.292,150.368 169.592,150.068 D3.1@169.592,147.914 169.9,148.222 171.158,148.222 171.714,148.778 C31.2@173.173,148.778 C31.2@173.192,148.796
NetC38_1: C38.1 D4.1 D6.2 | length 10.3
  SIG/PWR1 w0.5: 164.907,133.67 165.623,133.67 166.167,134.214 166.167,136.017 166.787,136.637 D6.2@168.271,136.637 170.274,136.637 172.077,138.44 C38.1@172.208,138.44
NetC38_2: C38.2 U7.10 | length 4.9
  SIG/PWR1 w0.308: C38.2@172.208,140.04 172.339,140.04 173,140.701 U7.10@176.801,140.701
NetC39_1: C39.1 U7.11 | length 3.2
  SIG/PWR1 w0.2: C39.1@173.884,139.964 C39.1@173.971,140.051
  SIG/PWR1 w0.308: C39.1@173.757,140.051 173.971,140.051 U7.11@176.801,140.051
NetC39_2: C39.2 D5.1 D7.2 | length 8.9
  SIG/PWR1 w0.5: C39.2@173.884,138.44 173.828,138.384 173.828,137.419 173.325,136.916 172.432,136.916 171.733,136.217 171.733,134.867 D7.2@171.7,134.834 D5.1@175.129,134.834 D5.1@175.129,135.259
NetC42_1: C42.1 D8.1 L7.1 U7.18 | length 0.4
  SIG/PWR1 w0.308: C42.1@185.351,140.753 185.527,140.929 C42.1@185.644,140.929
NetC42_2: C42.2 U7.17 | length 3
  SIG/PWR1 w0.308: U7.17@182.601,139.401 C42.2@185.644,139.401
NetC43_2: C43.2 U7.25 | length 3.3
  SIG/PWR1 w0.308: U7.25@182.601,144.601 183.83,144.601 184.781,145.552 C43.2@185.543,145.552
NetC44_2: C44.2 U7.26 | length 3.8
  SIG/PWR1 w0.308: U7.26@182.601,145.251 183.722,145.251 185.543,147.072 C44.2@185.543,147.203
NetC45_1: C45.1 R37.1 R38.2 U7.15 | length 6.4
  SIG/PWR1 w0.308: U7.15@182.601,138.101 183.126,138.101 184.183,137.043 R38.2@184.183,135.874 184.177,135.868 184.177,132.706 C45.1@184.171,132.699
NetC46_2: C46.2 U7.28 | length 4.2
  SIG/PWR1 w0.308: U7.28@182.601,146.551 182.606,146.557 182.606,146.959 183.155,147.508 184.222,147.508 185.261,148.547 185.392,148.547 185.568,148.723 C46.2@185.568,148.854
NetC47_2: C47.2 U7.2 | length 2.1
  SIG/PWR1 w0.308: C47.2@174.798,145.628 175.51,145.628 175.783,145.901 U7.2@176.801,145.901
NetC50_1: C50.1 R36.1 U7.24 | length 20.1
  SIG/PWR1 w0.308: v1(179.167,132.547) 179.167,134.046 C50.1@179.193,134.071 179.193,135.811 R36.1@179.256,135.874 ; U7.24@182.601,143.951 182.638,143.913 184.184,143.913 v1(184.222,143.875)
  SIG/PWR2 w0.308: v1(179.167,132.547) 179.167,132.626 179.447,132.906 179.447,132.919 179.954,133.426 181.026,133.426 185.449,137.849 185.449,142.649 v1(184.222,143.875)
NetC62_2: C62.2 C63.2 P7.2 R55.1 U11.2 | length 58.1
  SIG/PWR1 w0.171: U11.2@140.818,159.436 141.503,159.436 142.748,158.191 R55.1@143.345,158.191 143.667,157.868 143.918,157.868 144.018,157.768 144.018,157.074 144.628,156.464 ; C62.2@144.628,153.137 C63.2@144.628,154.788 144.628,156.464 ; P7.2@189.941,166.116 186.766,166.116 178.206,157.556 152.051,157.556 151.446,156.951 145.114,156.951 144.628,156.464
NetC64_2: C64.2 R56.2 U11.81 | length 5.8
  SIG/PWR1 w0.171: U11.81@137.343,158.361 137.343,156.993 138.481,155.854 138.481,154.737 138.544,154.674 R56.2@138.544,153.01
NetC65_2: C65.2 R57.2 U11.83 | length 9.1
  SIG/PWR1 w0.171: U11.83@138.143,158.361 138.143,157.615 139.086,156.672 142.083,156.672 143.154,155.6 C65.2@143.154,154.813 R57.2@143.154,153.099 ; R57.2@143.027,153.073 R57.2@143.04,153.06
NetC81_2: C81.2 R65.1 SW6.2 SW7.2 SW8.2 SW9.2 SW10.2 TP21.1 U11.79 | length 85.1
  SIG/PWR1 w0.171: v3(103.657,156.032) 101.752,157.937 101.752,179.984 102.819,181.051 107.798,181.051 109.118,182.372 ; v3(114.325,149.327) 121.31,149.327 123.927,146.71 129.184,146.71 129.743,147.269 131.826,147.269 132.334,146.761 133.261,146.761 v1(136.207,149.708) R65.1@136.207,150.901 ; R65.1@136.272,150.901 136.272,154.431 136.072,154.631 135.589,154.631 C81.2@135.484,154.737 135.484,156.016 136.543,157.075 U11.79@136.543,158.361
  SIG/PWR2 w0.171: v3(103.657,156.032) 109.728,156.032 114.325,151.435 v3(114.325,149.327) ; v1(136.207,149.708) 137.846,149.708 TP21.1@138.836,150.698